# EAGLE board ECEN 4350 Lab 3 (EAGLE 9.6.2)

Size 160 x 100 mm. Coordinates in mm from the lower left corner, seen from the top.
Outline: 0,0 160,0 160,100 0,100 0,0
Copper layers (1*16): Top 0.035mm / dielectric 1.5mm / Bottom 0.035mm
Design rules "default": minimum track width 6mil, minimum drill 0.35mm, track to track 6mil, track to pad 6mil, pad to pad 6mil, via to via 6mil, smd to smd 6mil, copper to edge 40mil, drill to drill 6mil, minimum pad ring 10mil, minimum via ring 8mil, stop-mask expansion 4mil, vias tented up to drill 0mil, thermal gap 10mil

## Footprints (pad centres in the part's own frame; a part is rotated, then mirrored left to right if it is on the bottom)
C1206 = smd 1.6 x 1.8: 1 -1.4,0; 2 1.4,0
GCT_USB2066-05-RBHM-XX-STB-00-00-A_REVD = smd 0.5 x 2.3: 1 -1.6,2.6; 2 -0.8,2.6; 3 0,2.6; 4 0.8,2.6; 5 1.6,2.6 | smd 2 x 2.5: 6 4.45,-3; 7 4.45,2.5; 8 -4.45,-3; 9 -4.45,2.5
1X08 = drill 1.016 long: 1 -8.89,0; 2 -6.35,0; 3 -3.81,0; 4 -1.27,0; 5 1.27,0; 6 3.81,0; 7 6.35,0; 8 8.89,0
1X16 = drill 1.016 long: 1 -19.05,0; 2 -16.51,0; 3 -13.97,0; 4 -11.43,0; 5 -8.89,0; 6 -6.35,0; 7 -3.81,0; 8 -1.27,0; 9 1.27,0; 10 3.81,0; 11 6.35,0; 12 8.89,0; 13 11.43,0; 14 13.97,0; 15 16.51,0; 16 19.05,0
R1206 = smd 1.6 x 1.803: 1 -1.422,0; 2 1.422,0
B3F-10XX = drill 1.016 long: 1 -3.251,2.261; 2 3.251,2.261; 3 -3.251,-2.261; 4 3.251,-2.261
HTQFP64_10X10_NXP = smd 1.346 x 0.279: 1 -5.677,3.75; 2 -5.677,3.25; 3 -5.677,2.75; 4 -5.677,2.25; 5 -5.677,1.75; 6 -5.677,1.25; 7 -5.677,0.75; 8 -5.677,0.25; 9 -5.677,-0.25; 10 -5.677,-0.75; 11 -5.677,-1.25; 12 -5.677,-1.75; 13 -5.677,-2.25; 14 -5.677,-2.75; 15 -5.677,-3.25; 16 -5.677,-3.75; 33 5.677,-3.75; 34 5.677,-3.25; 35 5.677,-2.75; 36 5.677,-2.25; 37 5.677,-1.75; 38 5.677,-1.25; 39 5.677,-0.75; 40 5.677,-0.25; 41 5.677,0.25; 42 5.677,0.75; 43 5.677,1.25; 44 5.677,1.75; 45 5.677,2.25; 46 5.677,2.75; 47 5.677,3.25; 48 5.677,3.75 | smd 0.279 x 1.346: 17 -3.75,-5.677; 18 -3.25,-5.677; 19 -2.75,-5.677; 20 -2.25,-5.677; 21 -1.75,-5.677; 22 -1.25,-5.677; 23 -0.75,-5.677; 24 -0.25,-5.677; 25 0.25,-5.677; 26 0.75,-5.677; 27 1.25,-5.677; 28 1.75,-5.677; 29 2.25,-5.677; 30 2.75,-5.677; 31 3.25,-5.677; 32 3.75,-5.677; 49 3.75,5.677; 50 3.25,5.677; 51 2.75,5.677; 52 2.25,5.677; 53 1.75,5.677; 54 1.25,5.677; 55 0.75,5.677; 56 0.25,5.677; 57 -0.25,5.677; 58 -0.75,5.677; 59 -1.25,5.677; 60 -1.75,5.677; 61 -2.25,5.677; 62 -2.75,5.677; 63 -3.25,5.677; 64 -3.75,5.677 | smd 3.607 x 3.607: EPAD 0,0
SOIC127P599X175-8N = smd 1.97 x 0.6: 1 -2.47,1.905; 2 -2.47,0.635; 3 -2.47,-0.635; 4 -2.47,-1.905; 5 2.47,-1.905; 6 2.47,-0.635; 7 2.47,0.635; 8 2.47,1.905
MODULE_ESP-WROOM-02 = smd 1.485 x 0.9: 1 -8.893,4.9; 2 -8.893,3.4; 3 -8.893,1.9; 4 -8.893,0.4; 5 -8.893,-1.1; 6 -8.893,-2.6; 7 -8.893,-4.1; 8 -8.893,-5.6; 9 -8.893,-7.1; 10 8.893,-7.1; 11 8.893,-5.6; 12 8.893,-4.1; 13 8.893,-2.6; 14 8.893,-1.1; 15 8.893,0.4; 16 8.893,1.9; 17 8.893,3.4; 18 8.893,4.9 | smd 4 x 4: 19 1,-1.5
SOIJ8_SM_MCH = smd 1.473 x 0.559: 1 -3.594,1.905; 2 -3.594,0.635; 3 -3.594,-0.635; 4 -3.594,-1.905; 5 3.594,-1.905; 6 3.594,-0.635; 7 3.594,0.635; 8 3.594,1.905
VISHAY_VCNL4040_4X2X1.1 = smd 0.7 x 0.725: 1 -0.7,1.613; 2 -0.7,0.537; 3 -0.7,-0.537; 4 -0.7,-1.613; 5 0.7,-1.613; 6 0.7,-0.537; 7 0.7,0.537; 8 0.7,1.613

## Placement (x,y rotation side)
C1  [C1206]  -97.79,-38.1 0 top  (outside the outline)
C2  [C1206]  -97.79,-43.18 0 top  (outside the outline)
C3  [C1206]  -97.79,-48.26 0 top  (outside the outline)
J1  USB2066-05-RBHM-XX-STB-00-00-A_REVD  [GCT_USB2066-05-RBHM-XX-STB-00-00-A_REVD]  20.32,64.77 0 top
JP1  [1X08]  -29.21,69.85 0 top  (outside the outline)
JP2  [1X16]  52.07,53.34 270 top
JP3  [1X16]  77.47,74.93 180 top
JP4  [1X16]  101.6,53.34 90 top
JP5  [1X16]  76.2,33.02 0 top
JP6  [1X08]  -29.21,55.88 0 top  (outside the outline)
R1  [R1206]  125.73,20.32 0 top
R2  [R1206]  -97.79,-33.02 0 top  (outside the outline)
S1  [B3F-10XX]  132.08,57.15 0 top
S2  [B3F-10XX]  148.59,57.15 0 top
U1  LPC55S14JBD64E  [HTQFP64_10X10_NXP]  76.2,54.61 0 top
U2  SN65HVD231QDR  [SOIC127P599X175-8N]  31.75,91.44 0 top
U3  ESP-WROOM-02  [MODULE_ESP-WROOM-02]  139.7,78.74 0 top
U4  48LM01-I/SM  [SOIJ8_SM_MCH]  49.53,16.51 0 top
U6  VCNL4040M3OE  [VISHAY_VCNL4040_4X2X1.1]  78.74,90.17 0 top

## Library data of the parts
C1-C3 = rcl; SPICEPREFIX: C
J1 = USB2066-05-RBHM-XX-STB-00-00-A_REVD; DESCRIPTION: USB - mini B USB 2.0 Receptacle Connector 5 Position Surface Mount, Right Angle; DIGI-KEY_PART_NUMBER: 2073-USB2066-05-RBHM-15-STB-00-00-ACT-ND; MF: Global Connector Technology; MP: USB2066-05-RBHM-15-STB-00-00-A; PACKAGE: None; PURCHASE-URL: https://pricing.snapeda.com/search/part/USB2066-05-RBHM-15-STB-00-00-A/?ref=eda
JP1-JP6 = pinhead
R1 R2 = rcl; SPICEPREFIX: R
S1 S2 = switch-omron; MPN: B3F-1000; OC_FARNELL: 176432; OC_NEWARK: 36M3542
U1 = LPC55S14JBD64E; COPYRIGHT: Copyright (C) 2021 Ultra Librarian. All rights reserved.; MANUFACTURER_PART_NUMBER: LPC55S14JBD64E; MFR_NAME: NXP
U2 = SN65HVD231QDR; AVAILABILITY: In Stock; DESCRIPTION: 3.3-V CAN Transceiver with Sleep Mode 8-SOIC -40 to 125; MF: Texas Instruments; MP: SN65HVD231QDR; PACKAGE: SOIC-8 Texas Instruments; PRICE: None; PURCHASE-URL: https://pricing.snapeda.com/search/part/SN65HVD231QDR/?ref=eda
U3 = ESP-WROOM-02; DESCRIPTION: WiFi 802.11b/g/n Transceiver Module 2.4GHz ~ 2.5GHz Integrated, Trace Surface Mount; DIGI-KEY_PART_NUMBER: 1904-1009-1-ND; MF: Espressif Systems; MP: ESP-WROOM-02; PACKAGE: SMD-18 Espressif Systems; PURCHASE-URL: https://pricing.snapeda.com/search/part/ESP-WROOM-02/?ref=eda
U4 = 48LM01-I_SM; COPYRIGHT: Copyright (C) 2021 Ultra Librarian. All rights reserved.; DIGI-KEY_PART_NUMBER_1: 150-48LM01-I/SM-ND; MANUFACTURER_PART_NUMBER: 48LM01-I/SM; MFR_NAME: Microchip
U6 = VCNL4040M3OE; AVAILABILITY: In Stock; DESCRIPTION: Optical Sensor Ambient 550nm I²C 8-SMD Module; MF: Vishay; MP: VCNL4040M3OE; PACKAGE: SMD-8 Vishay; PRICE: None; PURCHASE-URL: https://pricing.snapeda.com/search/part/VCNL4040M3OE/?ref=eda

## Nets
+3V3: R1.2 R2.2 U3.1 U4.8
+5V: JP1.6 JP6.6
CS: JP1.1 JP6.1
GND: C1.2 C2.2 C3.2 J1.5 JP1.5 JP6.5 S1.1 S1.2 S2.3 S2.4 U2.2 U3.9 U3.13 U3.18 U3.19 U4.4 U6.1
MISO: JP1.3 JP6.3
MOSI: JP1.2 JP6.2
N$1: JP2.1 U1.1
N$2: JP2.2 U1.2
N$3: JP2.3 U1.3
N$4: JP2.4 U1.4
N$5: JP2.5 U1.5
N$6: JP2.6 U1.6
N$7: JP2.7 U1.7
N$8: JP2.8 U1.8
N$9: JP2.9 U1.9
N$10: JP2.10 U1.10
N$11: JP2.11 U1.11
N$12: JP2.12 U1.12
N$13: JP2.13 U1.13
N$14: JP2.14 U1.14
N$15: JP2.15 U1.15
N$16: JP2.16 U1.16
N$17: JP5.1 U1.17
N$18: JP5.2 U1.18
N$19: JP5.3 U1.19
N$20: JP5.4 U1.20
N$21: JP5.5 U1.21
N$22: JP5.6 U1.22
N$23: JP5.7 U1.23
N$24: JP5.8 U1.24
N$25: JP5.9 U1.25
N$26: JP5.10 U1.26
N$27: JP5.11 U1.27
N$28: JP5.12 U1.28
N$29: JP5.13 U1.29
N$30: JP5.14 U1.30
N$31: JP5.15 U1.31
N$32: JP5.16 U1.32
N$33: C1.1 R1.1 S1.3 S1.4 U3.2
N$34: C2.1 R2.1 S2.1 S2.2 U3.15
N$35: C3.1 U4.3
N$36: JP3.16 U1.64
N$37: JP3.15 U1.63
N$38: JP3.14 U1.62
N$39: JP3.13 U1.61
N$40: JP3.12 U1.60
N$41: JP3.11 U1.59
N$42: JP3.10 U1.58
N$43: JP3.9 U1.57
N$44: JP3.8 U1.56
N$45: JP3.7 U1.55
N$46: JP3.6 U1.54
N$47: JP3.5 U1.53
N$48: JP3.4 U1.52
N$49: JP3.3 U1.51
N$50: JP3.2 U1.50
N$51: JP3.1 U1.49
N$52: JP4.16 U1.48
N$53: JP4.15 U1.47
N$54: JP4.14 U1.46
N$55: JP4.13 U1.45
N$56: JP4.12 U1.44
N$58: JP4.11 U1.43
N$59: JP4.10 U1.42
N$60: JP4.9 U1.41
N$61: JP4.8 U1.40
N$62: JP4.7 U1.39
N$63: JP4.6 U1.38
N$64: JP4.5 U1.37
N$65: JP4.4 U1.36
N$66: JP4.3 U1.35
N$67: JP4.2 U1.34
N$68: JP4.1 U1.33
RXD: U3.11
SCL: JP1.8 JP6.8
SCLK: JP1.4 JP6.4
SDA: JP1.7 JP6.7
SHIELD: J1.6 J1.7 J1.8 J1.9
TXD: U3.12
VBUS: J1.1
VCC: U2.3
VDD: U6.3
VDD-LED: U6.4

## Tracks (layer width: path | path; a pad name or v marks a point on that pad's centre or on a via)
+3V3  (3 unrouted)
+5V  (1 unrouted)
CS  (1 unrouted)
GND  (16 unrouted)
MISO  (1 unrouted)
MOSI  (1 unrouted)
N$1  (1 unrouted)
N$2  (1 unrouted)
N$3  (1 unrouted)
N$4  (1 unrouted)
N$5  (1 unrouted)
N$6  (1 unrouted)
N$7  (1 unrouted)
N$8  (1 unrouted)
N$9  (1 unrouted)
N$10  (1 unrouted)
N$11  (1 unrouted)
N$12  (1 unrouted)
N$13  (1 unrouted)
N$14  (1 unrouted)
N$15  (1 unrouted)
N$16  (1 unrouted)
N$17  (1 unrouted)
N$18  (1 unrouted)
N$19  (1 unrouted)
N$20  (1 unrouted)
N$21  (1 unrouted)
N$22  (1 unrouted)
N$23  (1 unrouted)
N$24  (1 unrouted)
N$25  (1 unrouted)
N$26  (1 unrouted)
N$27  (1 unrouted)
N$28  (1 unrouted)
N$29  (1 unrouted)
N$30  (1 unrouted)
N$31  (1 unrouted)
N$32  (1 unrouted)
N$33  (4 unrouted)
N$34  (4 unrouted)
N$35  (1 unrouted)
N$36  (1 unrouted)
N$37  (1 unrouted)
N$38  (1 unrouted)
N$39  (1 unrouted)
N$40  (1 unrouted)
N$41  (1 unrouted)
N$42  (1 unrouted)
N$43  (1 unrouted)
N$44  (1 unrouted)
N$45  (1 unrouted)
N$46  (1 unrouted)
N$47  (1 unrouted)
N$48  (1 unrouted)
N$49  (1 unrouted)
N$50  (1 unrouted)
N$51  (1 unrouted)
N$52  (1 unrouted)
N$53  (1 unrouted)
N$54  (1 unrouted)
N$55  (1 unrouted)
N$56  (1 unrouted)
N$58  (1 unrouted)
N$59  (1 unrouted)
N$60  (1 unrouted)
N$61  (1 unrouted)
N$62  (1 unrouted)
N$63  (1 unrouted)
N$64  (1 unrouted)
N$65  (1 unrouted)
N$66  (1 unrouted)
N$67  (1 unrouted)
N$68  (1 unrouted)
SCL  (1 unrouted)
SCLK  (1 unrouted)
SDA  (1 unrouted)
SHIELD  (3 unrouted)